# Altium PCB NearSens_pcb_v1.2.0_altium.pcbdoc
Units mil, origin at the board's own origin, x right, y up, seen from the top; angles counter-clockwise.
Board outline 3360 x 4480 mil, 2 copper layers (Top Layer, Bottom Layer); 52 components, 87 nets, 320 pads, 79 vias.
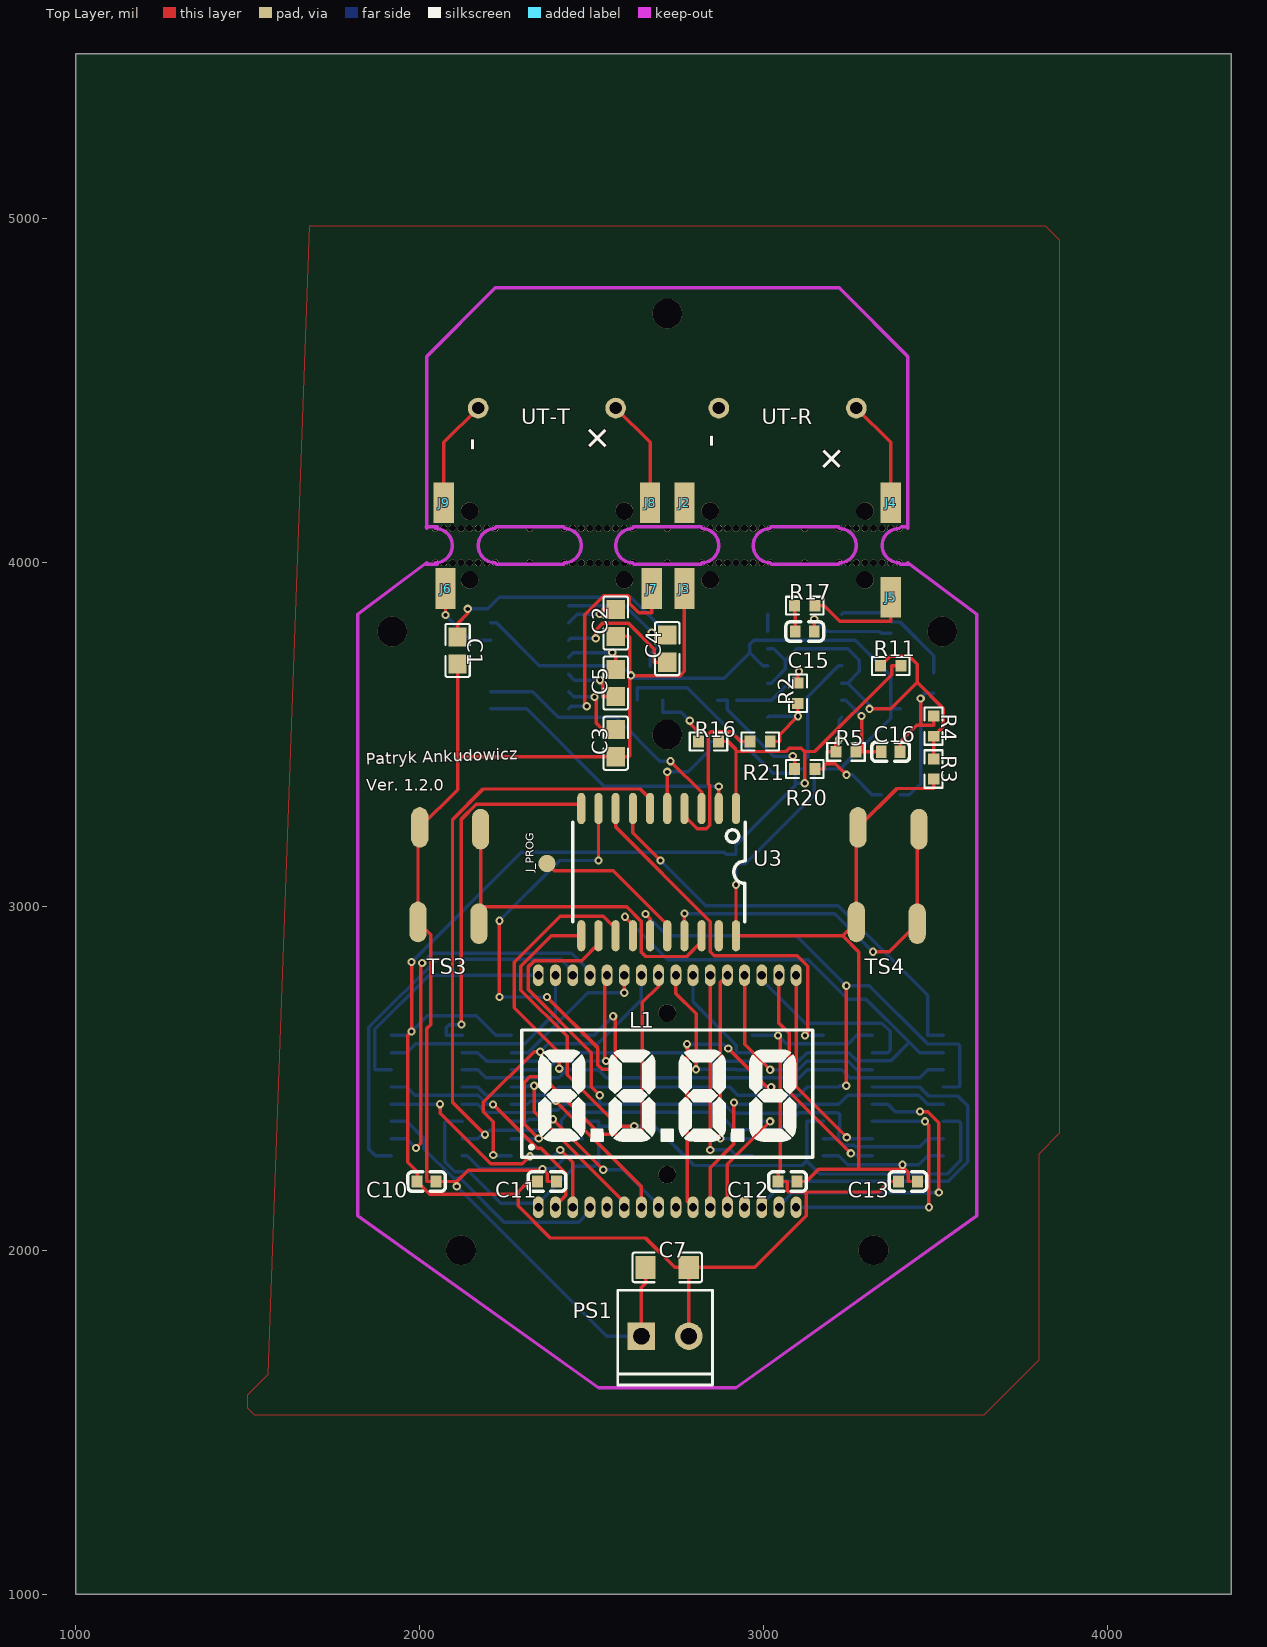
[diagram p0: Top Layer view]
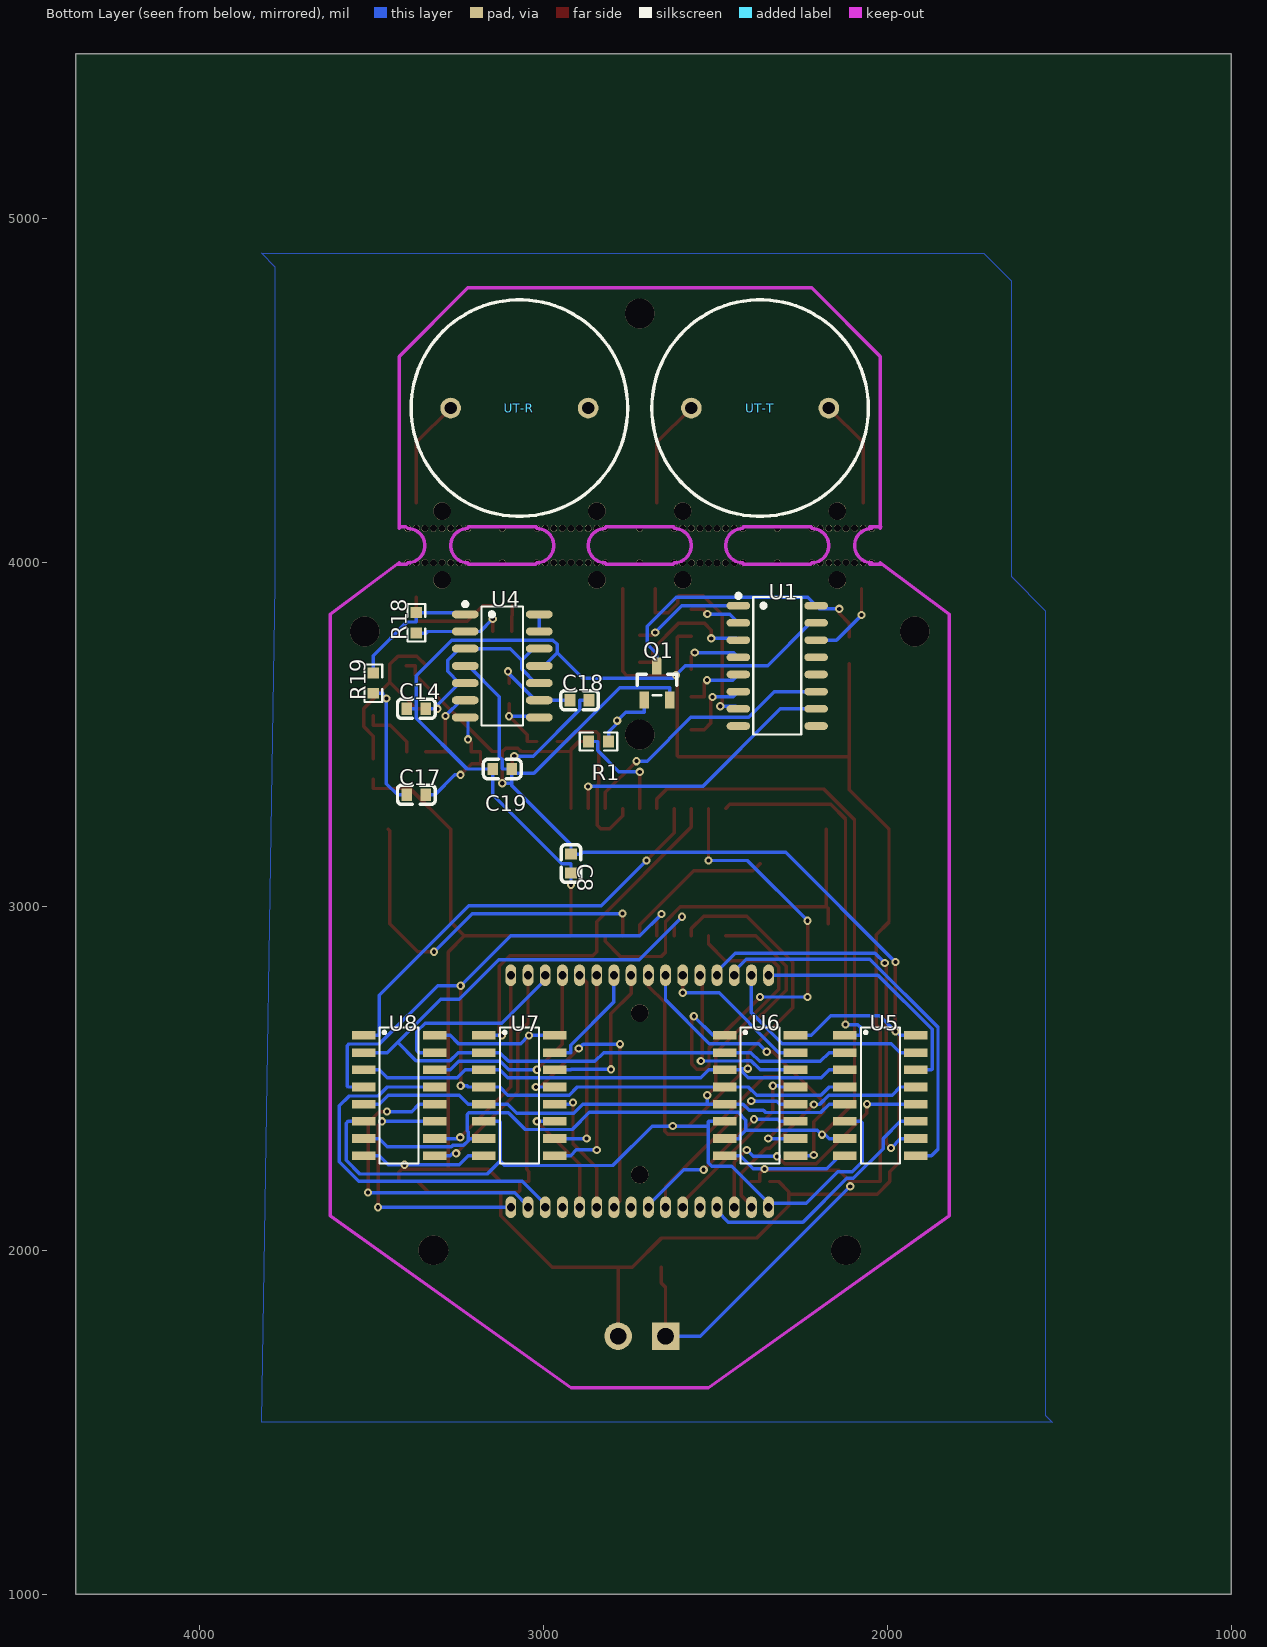
[diagram p1: Bottom Layer view, seen from below]

## Layer stack, top to bottom
Top Layer: signal copper (thickness not stored)
Dielectric: dielectric 12.6, FR-4, Dk 4.8
Bottom Layer: signal copper (thickness not stored)

## Board outline
4360,1000 1000,1000 1000,5480 4360,5480

## Components (designator, comment, footprint, x,y, rotation, side; value= is the part's Value field where it differs from the comment)
C1 "1u" C0805 2110,3745 r270 top
C2 "1u" C0805 2570,3825 r90 top
C3 "1u" C0805 2570,3475 r90 top
C4 "1u" C0805 2720,3750 r90 top
C5 "1u" C0805 2570,3650 r270 top
C7 "10u" C1206 2720,1950 r180 top
C8 "100n" C0603#1 2920,3125 r90 bottom
C10 "100n" C0603#2 2020,2200 r0 top
C11 "100n" C0603#2 2370,2200 r0 top
C12 "100n" C0603#2 3070,2200 r0 top
C13 "100n" C0603#2 3420,2200 r0 top
C14 "10n" C0603#1 3370,3575 r0 bottom
C15 "10n" C0603#2 3120,3800 r0 top
C16 "1n" C0603#2 3370,3450 r0 top
C17 "1n" C0603#1 3370,3325 r0 bottom
C18 "10n" C0603#1 2895,3600 r0 bottom
C19 "100n" C0603#1 3120,3400 r0 bottom
J2 "HDR-M-2.54_1x1" PAD 2770,4175 r0 top
J3 "HDR-M-2.54_1x1" PAD 2770,3925 r0 top
J4 "HDR-M-2.54_1x1" PAD 3370,4175 r0 top
J5 "HDR-M-2.54_1x1" PAD 3370,3900 r0 top
J6 "HDR-M-2.54_1x1" PAD 2075,3925 r0 top
J7 "HDR-M-2.54_1x1" PAD 2675,3925 r0 top
J8 "HDR-M-2.54_1x1" PAD 2670,4175 r0 top
J9 "HDR-M-2.54_1x1" PAD 2070,4175 r0 top
J_PROG "Programming" PAD-2.54-X1 2370,3125 r0 top
L1 "DE 117-TS-20/7,5/V" "DE 117-TS-20/7,5/V DISPLAY ELEKTRONIK - DISPLAY LCD" 2345,2125 r0 top
PS1 "M023.5MM" SCREW-CONNECTOR-2,54 2720,1750 r0 top
Q1 "BC857" PG-SOT23-3_L2.9-W1.3-P1.90-LS2.4-BR 2670,3650 r90 bottom
R1 "1k" R0603#1 2840,3480 r0 bottom
R2 "75k" R0603#2 3100,3620 r90 top
R3 "10k" R0603#2 3495,3400 r90 top
R4 "1k" R0603#2 3495,3525 r90 top
R5 "75k" R0603#2 3240,3450 r180 top
R11 "10k" R0603#2 3370,3700 r180 top
R16 "100k" R0603#2 2840,3480 r0 top
R17 "10k" R0603#2 3120,3875 r180 top
R18 "56k" R0603#1 3370,3825 r270 bottom
R19 "6k2" R0603#1 3495,3650 r270 bottom
R20 "7k5" R0603#2 3120,3400 r0 top
R21 "4k7" R0603#2 2990,3480 r0 top
TS3 "Measure" TACT-SWITCH 1995,2950 r0 top
TS4 "Test" TACT-SWITCH 3270,2950 r0 top
U1 "MAX232" SOP-16_L10.2-W3.9-P1.27-LS6.0-BL 2320,3700 r90 bottom
U3 "ATTINY1626-SU" SOIC-20_L12.8-W7.5-P1.27-LS10.3-TL 2695,3100 r270 top
U4 "LM324-DT" SOP-14_L8.6-W3.9-P1.27-LS6.0-BL 3120,3700 r90 bottom
U5 "MC14543BDG" "SOIC-16 D SUFFIX CASE 751B" 2020,2450 r90 bottom
U6 "MC14543BDG" "SOIC-16 D SUFFIX CASE 751B" 2370,2450 r90 bottom
U7 "MC14543BDG" "SOIC-16 D SUFFIX CASE 751B" 3070,2450 r90 bottom
U8 "MC14543BDG" "SOIC-16 D SUFFIX CASE 751B" 3420,2450 r90 bottom
UT-R "Przetwornik ultradźwiękowy" 16MM-TRANSDUCER 3070,4450 r0 bottom
UT-T "Przetwornik ultradźwiękowy" 16MM-TRANSDUCER 2370,4450 r0 bottom

## Footprints (in the part's own frame and the unit in brackets; to place one, negate y for a bottom-side part, rotate by r counter-clockwise, add the part's x,y. Pads: shape width x height; smd on the part's side, far side on the other; paste and mask are expansions set on the pad)
16MM-TRANSDUCER [mil]
  round 60 hole 36 paste+0 mask+2: +(200,0) -(-200,0)
  silkscreen extent -315,-315 315,315
C0603#1 [mm]
  rect 0.8x0.9 smd paste+0 mask+0.051: 1(0.7,0) 2(-0.7,0)
  silkscreen extent -1.39,-0.71 1.39,0.71
C0603#2 [mm]
  rect 0.8x0.9 smd paste+0 mask+0.051: 1(-0.7,0) 2(0.7,0)
  silkscreen extent -1.39,-0.71 1.39,0.71
C0805 [mm]
  rect 1.41x1.35 smd paste-100 mask+0.051: 1(-1,0) 2(1,0)
  silkscreen extent -1.96,-0.9 1.96,0.9
C1206 [mm]
  rect 1.485x1.728 smd paste-100 mask+0.051: 1(-1.593,0) 2(1.593,0)
  silkscreen extent -2.56,-1.09 2.56,1.09
"DE 117-TS-20/7,5/V DISPLAY ELEKTRONIK - DISPLAY LCD" [mm]
  oval 0.8x1.6 hole 0.6 paste+0 mask+0.051: 1(0,0) 2(1.27,0) 3(2.54,0) 4(3.81,0) 5(5.08,0) 6(6.35,0) 7(7.62,0) 8(8.89,0) 9(10.16,0) 10(11.43,0) 11(12.7,0) 12(13.97,0) 13(15.24,0) 14(16.51,0) 15(17.78,0) 16(19.05,0) 17(19.05,17.145) 18(17.78,17.145) 19(16.51,17.145) 20(15.24,17.145) 21(13.97,17.145) 22(12.7,17.145) 23(11.43,17.145) 24(10.16,17.145) 25(8.89,17.145) 26(7.62,17.145) 27(6.35,17.145) 28(5.08,17.145) 29(3.81,17.145) 30(2.54,17.145) 31(1.27,17.145) 32(0,17.145)
  silkscreen extent -1.23,3.7 20.28,13.1
PAD [mm]
  rect 1.5x3 smd paste+0 mask+0.051: 1(0,0)
PAD-2.54-X1 [mil]
  round 50 smd paste+0 mask+2.01: 1(0,0)
PG-SOT23-3_L2.9-W1.3-P1.90-LS2.4-BR [mm]
  rect 1.25x0.7 smd paste+0 mask+0.051: 1(-1.25,0.95) 2(-1.25,-0.95) 3(1.25,0)
  silkscreen extent -0.9,-1.46 0.65,1.46
R0603#1 [mil]
  rect 31.75x34.02 smd paste-3937.01 mask+2: 1(29.66,0) 2(-29.66,0)
  silkscreen extent -55,-26 55,26
R0603#2 [mil]
  rect 31.75x34.02 smd paste-3937.01 mask+2: 1(-29.66,0) 2(29.66,0)
  silkscreen extent -55,-26 55,26
SCREW-CONNECTOR-2,54 [mil]
  round 80 hole 47.24 slot 47.44 at 0 deg paste+0 mask+2: +(62.79,0)
  rect 80x80 hole 47.24 slot 47.44 at 0 deg paste+0 mask+2: -(-75,0)
  silkscreen extent -144,-142 132,134
"SOIC-16 D SUFFIX CASE 751B" [mm]
  rect 0.638x1.745 smd paste+0 mask+0.051: 1(4.445,2.622) 2(3.175,2.622) 3(1.905,2.622) 4(0.635,2.622) 5(-0.635,2.622) 6(-1.905,2.622) 7(-3.175,2.622) 8(-4.445,2.622) 9(-4.445,-2.622) 10(-3.175,-2.622) 11(-1.905,-2.622) 12(-0.635,-2.622) 13(0.635,-2.622) 14(1.905,-2.622) 15(3.175,-2.622) 16(4.445,-2.622)
  silkscreen extent -5.03,-1.45 5.03,1.45
SOIC-20_L12.8-W7.5-P1.27-LS10.3-TL [mm]
  oval 2.3x0.6 smd paste+0 mask+0.051: 1(-4.7,5.715) 2(-4.7,4.445) 3(-4.7,3.175) 4(-4.7,1.905) 5(-4.7,0.635) 6(-4.7,-0.635) 7(-4.7,-1.905) 8(-4.7,-3.175) 9(-4.7,-4.445) 10(-4.7,-5.715) 11(4.7,-5.715) 12(4.7,-4.445) 13(4.7,-3.175) 14(4.7,-1.905) 15(4.7,-0.635) 16(4.7,0.635) 17(4.7,1.905) 18(4.7,3.175) 19(4.7,4.445) 20(4.7,5.715)
  silkscreen extent -3.68,-6.35 3.68,6.39
SOP-14_L8.6-W3.9-P1.27-LS6.0-BL [mm]
  oval 0.595x1.968 smd paste+0 mask+0.051: 1(3.81,2.734) 2(2.54,2.734) 3(1.27,2.734) 4(0,2.734) 5(-1.27,2.734) 6(-2.54,2.734) 7(-3.81,2.734) 8(-3.81,-2.734) 9(-2.54,-2.734) 10(-1.27,-2.734) 11(0,-2.734) 12(1.27,-2.734) 13(2.54,-2.734) 14(3.81,-2.734)
  silkscreen extent -4.4,-1.52 4.71,2.88
SOP-16_L10.2-W3.9-P1.27-LS6.0-BL [mm]
  oval 0.56x1.745 smd paste+0 mask+0.051: 1(4.445,2.873) 2(3.175,2.873) 3(1.905,2.873) 4(0.635,2.873) 5(-0.635,2.873) 6(-1.905,2.873) 7(-3.175,2.873) 8(-4.445,2.873) 9(-4.445,-2.873) 10(-3.175,-2.873) 11(-1.905,-2.873) 12(-0.635,-2.873) 13(0.635,-2.873) 14(1.905,-2.873) 15(3.175,-2.873) 16(4.445,-2.873)
  silkscreen extent -5.08,-1.77 5.33,3.02
TACT-SWITCH [mm]
  oval 1.27x3 smd paste+0 mask+0.051: 1(4.5,0) 1(4.627,6.985) 2(0,0.127) 2(0.127,7.112)

## Free pads (board coordinates)
  round 86.61 hole 86.61 unplated paste+0: ""(1920,3800) ""(2120,2000) ""(2720,3500) ""(2720,4725) ""(3320,2000) ""(3520,3800)
  round 19.69 hole 19.69 unplated paste+0: ""(2045,4000) ""(2045,4100) ""(2070,4000) ""(2070,4100) ""(2095,4000) ""(2095,4100) ""(2120,4000) ""(2120,4100) ""(2145,4000) ""(2145,4100) ""(2170,4000) ""(2170,4100) ""(2195,4000) ""(2195,4100) ""(2220,4000) ""(2220,4100) ""(2320,4000) ""(2320,4100) ""(2420,3999.43) ""(2420,4100) ""(2445,3999.43) ""(2445,4100) ""(2470,3999.43) ""(2470,4100) ""(2495,3999.43) ""(2495,4100) ""(2520,3999.43) ""(2520,4100) ""(2545,3999.43) ""(2545,4100) ""(2570,3999.43) ""(2570,4100) ""(2595,3999.43) ""(2595,4100) ""(2620,3999.43) ""(2620,4100) ""(2720,4000) ""(2720,4100) ""(2820,4000) ""(2820,4100) ""(2845,4000) ""(2845,4100) ""(2870,4000) ""(2870,4100) ""(2895,4000) ""(2895,4100) ""(2920,4000) ""(2920,4100) ""(2945,4000) ""(2945,4100) ""(2970,4000) ""(2970,4100) ""(2995,4000) ""(2995,4100) ""(3020,4000) ""(3020,4100) ""(3120,4000) ""(3120,4100) ""(3220,4000) ""(3220,4100) ""(3245,4000) ""(3245,4100) ""(3270,4000) ""(3270,4100) ""(3295,4000) ""(3295,4100) ""(3320,4000) ""(3320,4100) ""(3345,4000) ""(3345,4100) ""(3370,4000) ""(3370,4100) ""(3395,4000) ""(3395,4100)
  round 51.18 hole 51.18 unplated paste+0: ""(2145,3950) ""(2145,4150) ""(2595,3950) ""(2595,4150) ""(2720,2220) ""(2720,2690) ""(2845,3950) ""(2845,4150) ""(3295,3950) ""(3295,4150)

## Via types
v1: diameter 24.02, hole 12.01, Top Layer to Bottom Layer, tented both sides, 79 vias

## Nets (pads, with @x,y where several pads share a name; then routed paths per layer and width w, separated by ;. In a path a pad name is that pad's centre, name@x,y a point inside that pad or via, vN(x,y) a via of type N, cw(c..) or ccw(c..) an arc to the next point about the centre after c; other vN are vias at no path point)
+5V: C7.1 C8.1 C10.1 C11.1 C12.1 C13.1 C19.2 PS1.+ Q1.2 R11.1 R16.2 U3.1 U4.4 U5.16 U6.16 U7.16 U8.16 | length 7236.5
  Top Layer w10: v1(1976.34,2838.57) v1(1976.34,2636.36) 1965.68,2625.7 1965.68,2255.63 1992.44,2228.87 C10.1 2029.65,2162.79 2286.22,2162.79 ; C11.1 2315.54,2200 2286.22,2170.68 2286.22,2162.79 ; PS1.+ C7.1@2782.79,1950 ; R16.2 2896.68,3480 2920,3456.68 2920,3450.91 ; U3.1 2920,3450.91 ; v1(3042.49,2625) 3049.17,2618.32 3049.17,2235.6 3042.44,2228.87 C12.1 3069.34,2200 3069.34,2173.1 3073.04,2169.4 3124.58,2169.4 ; v1(3120,3358.44) 3120,3450.91 ; C13.1 3365.54,2200 3334.94,2169.4 3124.58,2169.4 ; R11.1 3372.63,3700 3372.63,3674.37 3149.17,3450.91 3120,3450.91 ; 2286.22,2162.79 2286.22,2129.2 2379.82,2035.6 2656.72,2035.6 2742.32,1950 C7.1 C7.1@2782.79,1950 ; C7.1@2782.79,1950 2974.46,1950 3124.58,2100.12 3124.58,2169.4 ; 2920,3450.91 3065.44,3450.91 3075.31,3460.78 3110.13,3460.78 3120,3450.91
  Bottom Layer w10: U5.16 1962.25,2625 1973.61,2636.36 v1(1976.34,2636.36) 2022.1,2682.12 2164.13,2682.12 2221.25,2625 U6.16 ; v1(1976.34,2838.57) 2295.39,3157.62 2886.07,3157.62 2891.13,3152.56 C8.1 2920,3179.46 3092.44,3351.9 3092.44,3358.44 ; Q1.2 2632.6,3636.56 2632.66,3636.62 2778.61,3636.62 3027.64,3387.59 C19.2@3092.44,3387.59 ; U7.16 v1(3042.49,2625) 3066.41,2601.08 3247.33,2601.08 3271.25,2625 U8.16 ; v1(3120,3358.44) 3092.44,3358.44 ; U4.4 3218.15,3700 3128.17,3610.02 3128.17,3435.73 3119.34,3426.9 3119.34,3400 C19.2 C19.2@3092.44,3387.59 ; 3092.44,3358.44 3092.44,3375.18 C19.2@3092.44,3387.59
A: U3.12 U5.5 U6.5 U7.5 U8.5 | length 2204.8
  Top Layer w10: U3.12 2520,2891.72 2470.98,2842.7 2333.83,2842.7 2315.04,2823.91 2315.04,2758.94 2498.89,2575.09 2498.89,2475.66 v1(2523.69,2450.86)
  Bottom Layer w10: U5.5 2168.75,2425 2193.08,2400.67 2353.51,2400.67 2360,2407.16 2401.76,2407.16 2419.6,2425 U6.5 2523.69,2425 ; v1(2523.69,2450.86) 2523.69,2425 ; U8.5 3477.75,2425 3452.01,2450.74 3244.49,2450.74 3218.75,2425 U7.5 3103.96,2425 3077.73,2398.77 2912.32,2398.77 2886.09,2425 2523.69,2425
A1: L1.30 U5.9 | length 1127.4
  Bottom Layer w10: U5.9 1871.25,2275 1852.29,2293.96 1852.29,2648.3 2050.34,2846.35 2410.25,2846.35 2445,2811.6 L1.30
A2: L1.26 U6.9 | length 873.3
  Top Layer w10: v1(2213.86,2276.78) 2213.86,2374.07 2185.34,2402.59 2185.34,2430.27 2332.59,2577.52 v1(2350.64,2577.52)
  Bottom Layer w10: v1(2213.86,2276.78) 2219.47,2276.78 2221.25,2275 U6.9 ; v1(2350.64,2577.52) 2374.35,2601.23 2517.25,2601.23 2645,2728.98 L1.26
A3: L1.22 U7.9 | length 636.9
  Top Layer w10: v1(2845,2291.82) L1.22
  Bottom Layer w10: v1(2845,2291.82) 2904.43,2291.82 2921.25,2275 U7.9
A4: L1.18 U8.9 | length 670.2
  Top Layer w10: L1.18 3045,2660.72 3074.63,2631.09 3074.63,2461.35 v1(3254.06,2281.92)
  Bottom Layer w10: v1(3254.06,2281.92) 3264.33,2281.92 3271.25,2275 U8.9
ACTIVE: R1.1 U3.5 | length 308.2
  Top Layer w10: U3.5 v1(2720.01,3391.77)
  Bottom Layer w10: v1(2720.01,3391.77) 2780.53,3391.77 2842.63,3453.87 2842.63,3480 R1.1
B: U3.13 U5.3 U6.3 U7.3 U8.3 | length 2232.6
  Top Layer w10: v1(2405.88,2528.22) 2405.88,2575.04 2275.38,2705.54 2275.38,2838.44 2409.08,2972.14 2533.88,2972.14 2570,2936.02 U3.13
  Bottom Layer w10: U5.3 2168.75,2525 2192.52,2501.23 2322.49,2501.23 2323.2,2501.94 2404.69,2501.94 2427.75,2525 ; v1(2405.88,2528.22) 2424.53,2528.22 2427.75,2525 ; U8.3 3477.75,2525 3453.98,2501.23 3251.03,2501.23 3227.26,2525 U7.3 3127.75,2525 3103.98,2501.23 2542.52,2501.23 2518.75,2525 U6.3 2427.75,2525
B1: L1.29 U5.10 | length 1163.9
  Top Layer w10: v1(1988.93,2297.14) 2002.54,2310.75 2002.54,2831.38 v1(2007.1,2835.94)
  Bottom Layer w10: U5.10 1962.25,2325 1962.25,2323.82 v1(1988.93,2297.14) ; v1(2007.1,2835.94) 2035.71,2864.55 2441.8,2864.55 2495,2811.35 L1.29
B2: L1.25 U6.10 | length 1155.6
  Top Layer w10: v1(2346.29,2325) 2304.82,2366.47 2304.82,2489.14 2320.11,2504.43 2358,2504.43 2524.82,2337.61 2638.26,2337.61 2647.29,2346.64 2647.29,2720.89 2695,2768.6 L1.25
  Bottom Layer w10: U6.10 2312.25,2325 v1(2346.29,2325)
B3: L1.21 U7.10 | length 576
  Top Layer w10: v1(2874.35,2325) 2874.35,2779.35 L1.21
  Bottom Layer w10: v1(2874.35,2325) 2921.25,2325 U7.10
B4: L1.17 U8.10 | length 608.5
  Top Layer w10: L1.17 3095,2475.72 v1(3242.25,2328.47)
  Bottom Layer w10: v1(3242.25,2328.47) 3245.72,2325 U8.10
BL: U3.6 U5.7 U6.7 U7.7 U8.7 | length 3318.3
  Top Layer w10: v1(2189.89,2336.29) 2095.25,2430.93 2095.25,3252.86 2184.14,3341.75 2640.98,3341.75 2670,3312.73 U3.6
  Bottom Layer w10: U5.7 2168.75,2325 2180.04,2336.29 v1(2189.89,2336.29) 2203.07,2349.47 2411.1,2349.47 ; U6.7 2427.75,2325 2427.75,2332.82 2411.1,2349.47 ; U7.7 3218.75,2325 ; U8.7 3477.75,2325 3453.98,2301.23 3267.59,2301.23 3263.68,2305.14 3232.75,2305.14 3218.75,2319.14 3218.75,2325 ; 2411.1,2349.47 2411.1,2378.36 2433.92,2401.18 2866.82,2401.18 2916.77,2351.23 3053.11,2351.23 3101.88,2400 3216.81,2400 3221.83,2394.98 3221.83,2348.12 3218.75,2345.04 3218.75,2325
BP: L1.1 U3.11 U5.6 U6.6 U7.6 U8.6 | length 3192
  Top Layer w10: U3.11 2382.59,2914.96 2294.18,2826.55 2294.18,2756.88 2429.1,2621.96 2429.1,2510.58 2578.46,2361.22 v1(2624.06,2361.22)
  Bottom Layer w10: U5.6 2077.75,2375 2073.22,2370.47 2073.22,2257.54 2102.13,2228.63 2143.61,2228.63 2235.89,2136.35 L1.1@2345,2136.35 ; L1.1 L1.1@2345,2136.35 ; U6.6 2518.75,2375 2520.39,2373.36 2520.39,2361.22 ; U7.6 3127.75,2375 3125.67,2372.92 3125.67,2259.64 ; U8.6 3568.75,2375 3574.32,2369.43 3574.32,2261.92 3534.29,2221.89 3163.42,2221.89 3125.67,2259.64 ; L1.1@2345,2136.35 2452.59,2243.94 2509.93,2243.94 2520.39,2254.4 2520.39,2361.22 ; 2520.39,2361.22 v1(2624.06,2361.22) 2683.28,2361.22 2797.94,2246.56 3112.59,2246.56 3125.67,2259.64
C: U3.14 U5.2 U6.2 U7.2 U8.2 | length 2530.5
  Top Layer w10: v1(2596.9,2970.22) 2620,2947.12 U3.14
  Bottom Layer w10: U5.2 2168.75,2575 2194.43,2549.32 2371.23,2549.32 2396.91,2575 U6.2 2824.7,2575 2850.4,2549.3 3101.85,2549.3 3127.55,2575 3127.75,2575 U7.2 3248.19,2575 3271.96,2551.23 3370.87,2551.23 3424.31,2604.67 ; v1(2596.9,2970.22) 2721.45,2845.67 3130.65,2845.67 3245.61,2730.71 3298.27,2730.71 3424.31,2604.67 ; U8.2 3481.8,2575 3453.98,2575 3424.31,2604.67
C1: L1.4 U5.11 | length 741.3
  Bottom Layer w10: U5.11 1962.25,2375 2012.17,2325.08 2012.17,2295.62 2098.55,2209.24 2117.41,2209.24 2245.11,2081.54 2462.18,2081.54 2495,2114.36 L1.4
C2: L1.8 U6.11 | length 540.1
  Top Layer w10: v1(2387.31,2380.99) v1(2534.02,2234.28)
  Bottom Layer w10: U6.11 2312.25,2375 2318.24,2380.99 v1(2387.31,2380.99) ; v1(2534.02,2234.28) 2591.46,2234.28 2695,2130.74 L1.8
C3: L1.12 U7.11 | length 354
  Top Layer w10: L1.12 2895,2250.7 v1(3019.3,2375)
  Bottom Layer w10: U7.11 3012.25,2375 v1(3019.3,2375)
C4: L1.16 U8.11 | length 793.7
  Top Layer w10: v1(3469.53,2375) 3481.11,2363.42 v1(3481.11,2125)
  Bottom Layer w10: L1.16 v1(3481.11,2125) ; U8.11 v1(3469.53,2375)
C18_2: C18.2 R20.1 | length 340.3
  Top Layer w10: v1(3084.92,3437.56) 3084.92,3433.58 3090.34,3428.16 R20.1
  Bottom Layer w10: C18.2 2894.34,3600 2894.34,3573.1 3029.88,3437.56 v1(3084.92,3437.56)
D: U3.15 U5.4 U6.4 U7.4 U8.4 | length 2758.3
  Top Layer w10: v1(2656.58,2978.11) 2670,2964.69 U3.15 ; v1(3240.91,2478.5) 3241.02,2478.61 v1(3241.02,2769.64)
  Bottom Layer w10: U5.4 2168.75,2475 2168.96,2475 2192.73,2451.23 2380.17,2451.23 2403.94,2475 2427.75,2475 U6.4 2518.75,2475 2901.76,2475 2925.53,2451.23 3103.98,2451.23 3127.75,2475 U7.4 3218.75,2475 3222.25,2478.5 v1(3240.91,2478.5) ; v1(2656.58,2978.11) 2719.68,2915.01 3095.65,2915.01 v1(3241.02,2769.64) 3308.01,2769.64 3477.65,2600 3566.19,2600 3571.37,2594.82 3571.37,2477.62 3568.75,2475 U8.4
D1: L1.3 U5.12 | length 777.9
  Top Layer w10: v1(2059.1,2425) 2059.1,2398.61 2206.36,2251.35 2298.75,2251.35 v1(2320.67,2273.27) ; v1(2408.63,2291.84) 2445,2255.47 L1.3
  Bottom Layer w10: U5.12 v1(2059.1,2425) ; v1(2320.67,2273.27) 2390.06,2273.27 v1(2408.63,2291.84)
D2: L1.7 U6.12 | length 544.8
  Top Layer w10: v1(2395.68,2433.91) 2645,2184.59 L1.7
  Bottom Layer w10: U6.12 2312.25,2425 2321.16,2433.91 v1(2395.68,2433.91)
D3: L1.11 U7.12 | length 388.1
  Top Layer w10: L1.11 2845,2240.51 2914.09,2309.6 v1(2914.09,2429.82)
  Bottom Layer w10: v1(2914.09,2429.82) 2918.91,2425 U7.12
D4: L1.15 U8.12 | length 904.1
  Top Layer w10: v1(3455.02,2403.51) 3477.46,2403.51 3510.17,2370.8 v1(3510.17,2167.7)
  Bottom Layer w10: L1.15 3045,2128.87 3083.83,2167.7 v1(3510.17,2167.7) ; U8.12 3362.25,2425 3383.74,2403.51 v1(3455.02,2403.51)
E1: L1.2 U5.13 | length 723.5
  Top Layer w10: v1(2213.45,2424.02) 2341.2,2296.27 2352.81,2296.27 2424.79,2224.29 2424.79,2159.38 2395,2129.59 L1.2
  Bottom Layer w10: U5.13 1962.25,2475 1986.06,2451.19 2169.85,2451.19 2197.02,2424.02 v1(2213.45,2424.02)
E2: L1.6 U6.13 | length 529.9
  Top Layer w10: v1(2332.81,2478.72) 2332.81,2402.46 2595,2140.27 L1.6
  Bottom Layer w10: U6.13 2312.25,2475 2315.97,2478.72 v1(2332.81,2478.72)
E3: L1.10 U7.13 | length 833.5
  Top Layer w10: v1(2777.62,2599.58) 2777.62,2142.38 L1.10 ; v1(2897.57,2586.97) 3009.53,2475.01 v1(3022.23,2475)
  Bottom Layer w10: v1(2777.62,2599.58) 2884.96,2599.58 v1(2897.57,2586.97) ; U7.13 v1(3022.23,2475)
E4: L1.14 U8.13 | length 1122
  Bottom Layer w10: L1.14 2995,2134.4 3061.93,2201.33 3537.69,2201.33 3594.06,2257.7 3594.06,2420.08 3565.37,2448.77 3480.92,2448.77 3454.69,2475 U8.13
ECHO-IN: R21.1 U3.4 | length 517.4
  Top Layer w10: U3.4 2770,3264.14 2807.71,3226.43 2833.45,3226.43 2843.76,3236.74 2843.76,3352.82 2839.02,3357.56 2839.02,3501.43 2846.31,3508.72 2904.6,3508.72 2933.32,3480 R21.1
F1: L1.31 U5.15 | length 635.6
  Bottom Layer w10: U5.15 1962.25,2575 1988.48,2601.23 2305.74,2601.23 2395,2690.49 L1.31
F2: L1.27 U6.15 | length 451.3
  Top Layer w10: v1(2595,2749.08) L1.27
  Bottom Layer w10: U6.15 2315.05,2575 2489.13,2749.08 v1(2595,2749.08)
F3: L1.23 U7.15 | length 322.8
  Bottom Layer w10: L1.23 2795,2722.37 2921.25,2596.12 2921.25,2575 U7.15
F4: L1.19 U8.15 | length 558.1
  Bottom Layer w10: L1.19 2995,2787.46 3121.64,2660.82 3344.35,2660.82 3368.28,2636.89 3368.28,2581.03 3362.25,2575 U8.15
G1: L1.32 U5.14 | length 704.4
  Bottom Layer w10: U5.14 1871.25,2525 1869.66,2526.59 1869.66,2642.75 2026.91,2800 L1.32
G2: L1.28 U6.14 | length 540.6
  Top Layer w10: v1(2542.19,2550.48) 2538.37,2554.3 2538.37,2793.37 L1.28
  Bottom Layer w10: U6.14 2369.84,2525 2396.28,2551.44 2415.5,2551.44 2416.46,2550.48 v1(2542.19,2550.48)
G3: L1.24 U7.14 | length 461.5
  Top Layer w10: L1.24 2745,2746.95 2803.95,2688 v1(2803.95,2526.23)
  Bottom Layer w10: v1(2803.95,2526.23) 2920.02,2526.23 2921.25,2525 U7.14
G4: L1.20 U8.14 | length 623.5
  Top Layer w10: L1.20 2945,2599.59 v1(3019.32,2525.27)
  Bottom Layer w10: v1(3019.32,2525.27) 3100.73,2525.27 3125.37,2549.91 3246.34,2549.91 3271.25,2525 U8.14
GND: C1.2 C2.1 C3.1 C7.2 C8.2 C10.2 C11.2 C12.2 C13.2 C14.1 C19.1 J2.1 J3.1 PS1.- R3.1 TS3.2 TS4.2 U1.15 U3.20 U4.11 U5.8 U6.8 U7.8 U8.8 UT-R.- | length 9459.6
  Top Layer w10: v1(2107.73,2186.01) 2107.73,2200 ; C1.2 2110,3435.63 ; v1(2357.16,2236.68) v1@2357.16,2233.09 ; C11.2 2370.66,2200 2370.66,2223.18 2360.75,2233.09 v1@2357.16,2233.09 ; C2.1 2607.73,3785.63 2610.3,3783.06 v1@2610.3,3672.51 ; v1@2610.3,3671.7 2757.5,3671.7 2770,3684.2 2770,3825.7 J3.1 ; v1(2614.83,3672.51) v1@2610.3,3672.51 ; PS1.- 2645,1892.53 2657.3,1904.83 C7.2 ; v1(2920,3063.11) U3.20 3229.96,2914.96 ; C12.2 3124.46,2200 3160.03,2235.57 3277.28,2235.57 ; v1(3404.49,2248.78) 3404.49,2235.57 ; C13.2 3420.66,2200 3420.66,2226.9 3411.99,2235.57 3404.49,2235.57 ; R3.1 3495,3343.32 3388.32,3343.32 3275,3230 3270,3225 3270,2955 3229.96,2914.96 ; 2107.73,2200 2074.46,2200 C10.2 2020.66,2200 2020.66,2645 2031.84,2656.18 2031.84,2918.16 1995,2955 1995,3225 2000,3230 2110,3340 2110,3435.63 ; 2107.73,2200 2140.82,2233.09 v1@2357.16,2233.09 ; 2110,3435.63 2532.28,3435.63 C3.1 2607.73,3435.63 2610.3,3438.2 2610.3,3671.66 v1@2610.3,3672.51 ; 3229.96,2914.96 3277.28,2867.64 3277.28,2235.57 ; 3277.28,2235.57 3404.49,2235.57
  Bottom Layer w10: v1(2107.73,2186.01) 2543.74,1750 PS1.- ; U5.8 2137.96,2275 2176.28,2236.68 v1(2357.16,2236.68) 2389.43,2236.68 2427.75,2275 U6.8 ; U1.15 2223.23,3825 2348.22,3700.01 2587.33,3700.01 v1(2614.83,3672.51) 2623.96,3663.38 2885.75,3663.38 2960.01,3737.64 ; v1(2920,3063.11) C8.2 2920,3124.34 2946.9,3124.34 3147.56,3325 C19.1 3222.56,3400 3370.66,3548.1 3370.66,3575 ; U4.11 2997.65,3700 2960.01,3737.64 ; U7.8 3218.75,2275 3244.97,2248.78 v1(3404.49,2248.78) 3451.53,2248.78 3477.75,2275 U8.8 ; C14.1 3370.66,3575 ; 2960.01,3737.64 2960.01,3762.54 2972.47,3775 3266.48,3775 3370.66,3670.82 3370.66,3575
J4_1: J4.1 UT-R.+ | length 316.4
  Top Layer w10: UT-R.+ 3370,4350 J4.1
J8_1: J8.1 UT-T.+ | length 316.4
  Top Layer w10: UT-T.+ 2670,4350 J8.1
J9_1: J9.1 UT-T.- | length 316.4
  Top Layer w10: J9.1 2070,4350 UT-T.-
L1_5: L1.5
L1_9: L1.9
L1_13: L1.13
LD1: U3.10 U5.1 | length 1085.2
  Top Layer w10: v1(2121.38,2656.49) 2121.38,3254.54 2163.81,3296.97 2458.07,3296.97 U3.10
  Bottom Layer w10: v1(2121.38,2656.49) 2085.62,2656.49 2077.75,2648.62 2077.75,2625 U5.1
LD2: U3.9 U6.1 | length 1446.3
  Top Layer w10: v1(2231.77,2736.83) v1(2231.77,2958.56) ; v1(2369.97,2736.83) 2518.46,2588.34 2518.46,2538.81 2530.33,2526.94 2553.56,2526.94 2568.38,2541.76 2568.38,2675.02 v1(2562.65,2680.75) ; v1(2520,3133.8) U3.9
  Bottom Layer w10: v1(2231.77,2736.83) v1(2369.97,2736.83) ; v1(2231.77,2958.56) 2407.01,3133.8 v1(2520,3133.8) ; U6.1 2506.9,2625 v1(2562.65,2680.75)
LD3: U3.8 U7.1 | length 1088.7
  Top Layer w10: U3.8 2570,3231.23 2845,2956.23 2845,2868.64 2856.91,2856.73 3097.95,2856.73 3128.83,2825.85 3128.83,2633.21 v1(3120.62,2625)
  Bottom Layer w10: v1(3120.62,2625) U7.1
LD4: U3.7 U8.1 | length 1286.9
  Top Layer w10: U3.7 2620,3214.05 v1(2700.56,3133.49)
  Bottom Layer w10: v1(2700.56,3133.49) 2831.69,3002.36 3217.6,3002.36 3477.75,2742.21 3477.75,2625 U8.1
Q1_1: Q1.1 R1.2 R16.1 | length 265.7
  Top Layer w10: v1(2785.64,3540.57) 2785.64,3532.86 2810.34,3508.16 R16.1
  Bottom Layer w10: Q1.1 2707.4,3565.04 2761.17,3565.04 v1(2785.64,3540.57) 2785.64,3532.86 2810.34,3508.16 R1.2
R17_1: J5.1 R17.1 | length 309.3
  Top Layer w10: R17.1 3176.68,3875 3221.88,3829.8 3370,3829.8 J5.1
R17_2: C15.1 R17.2 | length 75.9
  Top Layer w10: R17.2 3090.34,3846.84 3092.44,3844.74 C15.1
R19_1: C16.2 C17.1 R4.2 R19.1 | length 619.2
  Top Layer w10: C16.2 3397.56,3478.87 3446.32,3527.63 3457.12,3527.63 ; v1(3457.12,3605.3) 3457.12,3527.63 ; R4.2 3495,3527.63 3457.12,3527.63
  Bottom Layer w10: C17.1 3424.46,3325 3457.12,3357.66 v1(3457.12,3605.3) 3466.84,3615.02 3466.84,3620.34 R19.1
S$1052231: 
S$1052244: 
S$1514407: 
S$1514415: 
S$1514446: 
S$1514468: 
S$1514497: 
T1IN: U1.11 U3.3 | length 781.4
  Top Layer w10: v1(2729.14,3422.76) 2820,3331.9 U3.3
  Bottom Layer w10: U1.11 2328.26,3625 2403.26,3550 2571.31,3550 2698.55,3422.76 v1(2729.14,3422.76)
T2IN: U1.10 U3.2 | length 820.8
  Top Layer w10: U3.2 v1(2870,3349.19)
  Bottom Layer w10: U1.10 2311.12,3575 2536.93,3349.19 v1(2870,3349.19)
U1_1: C4.2 U1.1 | length 322.7
  Top Layer w10: v1(2675.01,3797.2) 2682.28,3789.93 2682.28,3789.37 C4.2
  Bottom Layer w10: U1.1 2597.21,3875 v1(2675.01,3797.2)
U1_2: C2.2 U1.2 | length 156
  Top Layer w10: v1(2523.36,3850.66) 2532.28,3859.58 2532.28,3864.37 C2.2
  Bottom Layer w10: U1.2 2458.75,3850.66 v1(2523.36,3850.66)
U1_3: C4.1 U1.3 | length 390.8
  Top Layer w10: v1(2511.98,3780.07) 2511.98,3804.06 2532.52,3824.6 2606.03,3824.6 2682.28,3748.35 2682.28,3710.63 C4.1
  Bottom Layer w10: U1.3 2438.16,3780.07 v1(2511.98,3780.07)
U1_4: C5.1 U1.4 | length 186
  Top Layer w10: v1(2559.88,3738.74) 2559.88,3738.4 2570,3728.28 C5.1
  Bottom Layer w10: U1.4 2446.83,3738.74 v1(2559.88,3738.74)
U1_5: C5.2 U1.5 | length 187.2
  Top Layer w10: v1(2524.67,3658.51) 2532.28,3650.9 2532.28,3610.63 C5.2
  Bottom Layer w10: U1.5 2449.58,3658.51 v1(2524.67,3658.51)
U1_6: C3.2 U1.6 | length 224.6
  Top Layer w10: v1(2508.43,3609.71) 2512.94,3605.2 2512.94,3533.71 2532.28,3514.37 C3.2
  Bottom Layer w10: U1.6 2448.38,3609.71 v1(2508.43,3609.71)
U1_7: J7.1 U1.7 | length 644.8
  Top Layer w10: v1(2485.81,3582.51) 2479.95,3588.37 2479.95,3848.96 2535.55,3904.56 2606.54,3904.56 2609.45,3901.65 2609.45,3882.58 2637.23,3854.8 2675,3854.8 J7.1
  Bottom Layer w10: U1.7 2440.6,3582.51 v1(2485.81,3582.51)
U1_8: U1.8
U1_9: U1.9
U1_12: U1.12
U1_13: U1.13
U1_14: J6.1 U1.14 | length 239.3
  Top Layer w10: v1(2075,3847.67) 2075,3854.8 J6.1
  Bottom Layer w10: v1(2075,3847.67) 2147.67,3775 U1.14
U1_16: C1.1 Q1.3 U1.16 | length 829.1
  Top Layer w10: C1.1 2110,3823.28 2139.65,3852.93 v1(2139.65,3865.9)
  Bottom Layer w10: v1(2139.65,3865.9) 2197.81,3865.9 U1.16 2231.73,3899.82 2613.24,3899.82 2698.34,3814.72 2698.34,3763.3 2670,3734.96 Q1.3
U3_16: J_PROG.1 U3.16 | length 456.1
  Top Layer w10: J_PROG.1 2390.72,3104.28 2563.25,3104.28 2720,2947.53 U3.16
U3_17: TS4.1 U3.17 | length 1098.2
  Top Layer w10: U3.17 v1(2770,2979.29) ; v1(3318.19,2868.47) 3365.64,2868.47 3447.17,2950 3447.17,3220 TS4.1@3452.17,3225
  Bottom Layer w10: v1(2770,2979.29) 3207.37,2979.29 v1(3318.19,2868.47)
U3_18: TS3.1 U3.18 | length 1066.8
  Top Layer w10: TS3.1@2172.17,2950 2172.17,2994.49 TS3.1@2177.17,2999.49 ; TS3.1@2177.17,3225 TS3.1@2177.17,2999.49 ; U3.18 2820,2898.37 2776.27,2854.64 2657.41,2854.64 2645,2867.05 2645,2956.16 2601.67,2999.49 TS3.1@2177.17,2999.49
U3_19: U3.19
U4_1: R18.2 R19.2 U4.1 | length 386.9
  Bottom Layer w10: U4.1 3232.29,3854.66 R18.2 3370,3827.63 3397.03,3827.63 3495,3729.66 R19.2
U4_2: C15.2 R18.1 U4.2 | length 276.2
  Top Layer w10: C15.2 3147.56,3828.87 v1(3147.56,3836.68)
  Bottom Layer w10: v1(3147.56,3836.68) 3184.24,3800 U4.2 3337.18,3800 3341.84,3795.34 R18.1
U4_6: C16.1 R5.1 U4.6 | length 253.5
  Top Layer w10: R5.1 R5.1@3285.2,3450 ; v1(3285.2,3554.12) R5.1@3285.2,3450 ; C16.1 R5.1@3285.2,3450
  Bottom Layer w10: U4.6 3239.32,3600 v1(3285.2,3554.12)
U4_7: C17.2 R5.2 R20.2 U4.7 | length 411.3
  Top Layer w10: R20.2 3176.68,3400 3176.68,3409 3183.32,3415.64 ; v1(3219.67,3486.3) 3211.53,3478.16 3210.34,3478.16 R5.2 3183.32,3450 3183.32,3415.64 ; v1(3241.39,3382.94) 3208.69,3415.64 3183.32,3415.64
  Bottom Layer w10: v1(3219.67,3486.3) 3219.67,3542.04 U4.7 ; v1(3241.39,3382.94) 3257.6,3382.94 3315.54,3325 C17.2
U4_8: R2.1 R21.2 U4.8 | length 248.7
  Top Layer w10: R21.2 3046.68,3480 3046.68,3499.97 v1@3100,3553.29 ; R2.1 3100,3563.32 v1@3100,3553.29 ; v1(3100.12,3553.29) v1@3100,3553.29
  Bottom Layer w10: U4.8 3015.66,3553.29 v1(3100.12,3553.29)
U4_9: C18.1 R2.2 U4.9 | length 253.4
  Top Layer w10: R2.2 3100,3676.68 3103.17,3679.85 v1(3103.17,3683.99)
  Bottom Layer w10: C18.1 U4.9 3023.17,3600 3103.17,3680 v1(3103.17,3683.99)
U4_12: C14.2 R3.2 R4.1 R11.2 U4.3 U4.5 U4.10 U4.12 | length 1251.1
  Top Layer w10: v1(3308.51,3575) 3370,3575 3447.08,3652.08 ; R11.2 3368.56,3728.22 3423.3,3728.22 3447.08,3704.44 3447.08,3652.08 ; R3.2 R4.1 3523.22,3523.56 3523.22,3575.93 3447.08,3652.08
  Bottom Layer w10: U4.10 3022.65,3650 3063.62,3690.97 3063.62,3716.72 ; U4.12 3030.34,3750 3063.62,3716.72 ; U4.5 U4.5@3244.49,3650 ; C14.2 3315.54,3575 v1(3308.51,3575) 3308.51,3585.98 U4.5@3244.49,3650 ; 3063.62,3716.72 3096.9,3750 U4.3 3244.66,3750 3278.59,3716.07 3278.59,3684.1 U4.5@3244.49,3650
U4_14: U4.13 U4.14 | length 50
  Bottom Layer w10: U4.13 U4.14

## Polygon pours and split planes (outlines as drawn)
GND on Bottom Layer (solid): 3780,3940 3780,4860 3820,4900 1720,4900 1640,4820 1640,3960 1540,3860 1540,1520 1520,1500 3820,1500
GND on Top Layer (solid): 1680,4980 3820,4980 3860,4940 3860,2340 3800,2280 3800,1680 3640,1520 1520,1520 1500,1540 1500,1580 1560,1640

## Keep-outs
Keep-Out Layer:
  lines w10 net S$1514407: 2220,4000 cw(c2220,4050) 2220,4100 ; 2620,4000 cw(c2620,4050) 2620,4100 ; 3020,4000 cw(c3020,4050) 3020,4100
  lines w10 net S$1514415: 2420,4000 ccw(c2420,4050) 2420,4100 ; 2820,4000 ccw(c2820,4050) 2820,4100 ; 3220,4000 ccw(c3220,4050) 3220,4100
  lines w10 net S$1514446: 3395,4000 cw(c3395,4050) 3395,4100
  lines w10 net S$1514468: 2045,4000 ccw(c2045,4050) 2045,4100

## Silkscreen, mask and mechanical layers (free items; w line width, h text height)
Top Overlay:
  text "Patryk Ankudowicz" at 1845,3400 h59.05 r2
  text "Ver. 1.2.0" at 1845,3325 h59.05

## Text inside footprints (layer, text, board x,y; h text height)
UT-R: Top Overlay "-" at 2880,4335 h80 r90; Top Overlay "+" at 3206.72,4358.28 h80 r225
UT-T: Top Overlay "-" at 2185,4325 h80 r90; Top Overlay "+" at 2573.28,4353.28 h80 r135